# Altium PCB ch340-usb-serial_V1.1.PcbDoc
Units mil, origin at the board's own origin, x right, y up, seen from the top; angles counter-clockwise.
Board outline 2272.83 x 925 mil, 2 copper layers (Top Layer, Bottom Layer); 23 components, 23 nets, 102 pads, 27 vias.
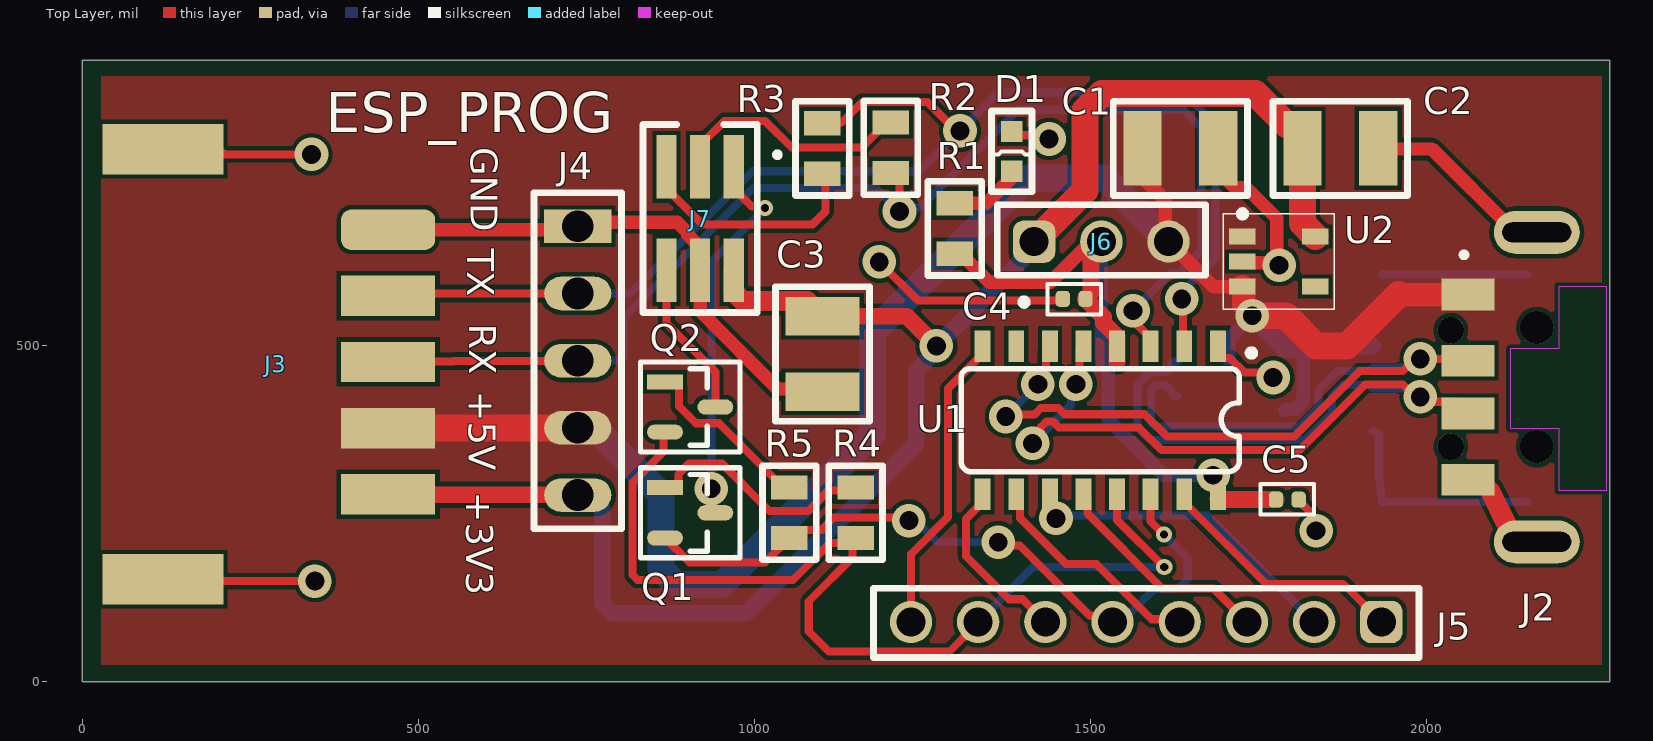
[diagram p0: Top Layer view]
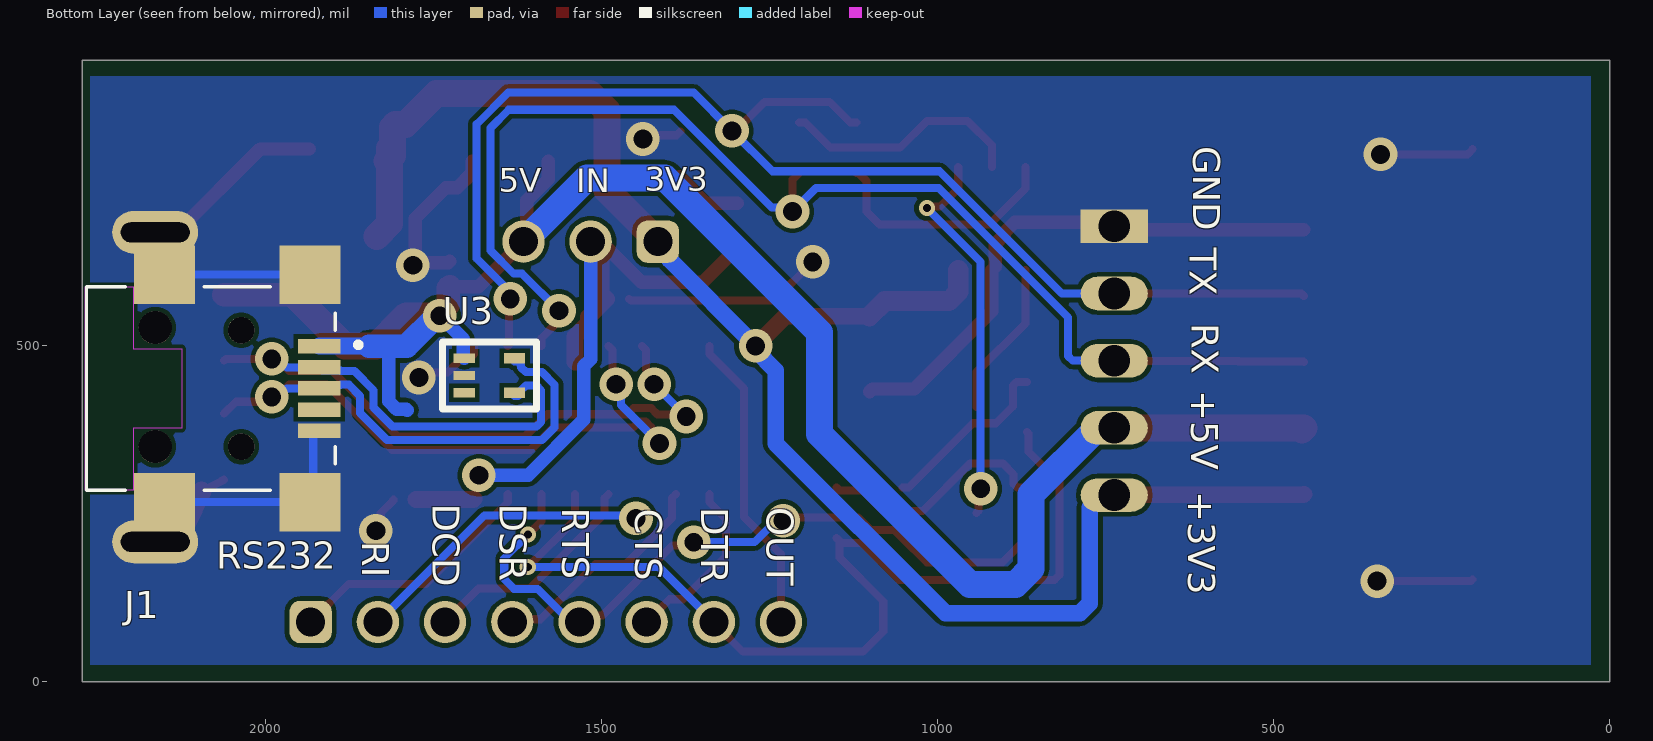
[diagram p1: Bottom Layer view, seen from below]
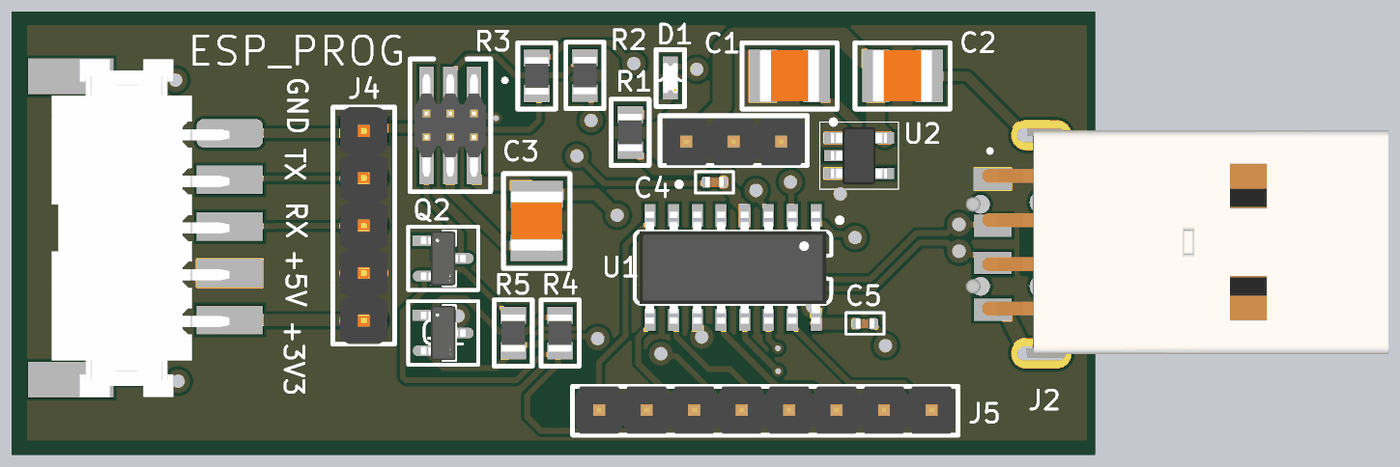
[diagram p2: 3D render of the assembled board from above, using the file's embedded part models]

## Layer stack, top to bottom
Top Solder: solder mask 0.4, Solder Resist, Dk 3.5
Top Layer: signal copper 1.4
Dielectric 1: dielectric 12.6, FR-4, Dk 4.8
Bottom Layer: signal copper 1.4
Bottom Solder: solder mask 0.4, Solder Resist, Dk 3.5

## Board outline
2272.83,925 2272.65,901 2272.65,0 0,0 0,925

## Design rules (kind name [scope] priority, off if disabled: settings)
Clearance "USB_holes and pins" [WithinRoom('PIN&HOLES') vs WithinRoom('PIN&HOLES')] p1: gap=0 ignorepadtopadclearanceinfootprint=TRUE
Clearance [All] p2: gap=6.5 ignorepadtopadclearanceinfootprint=TRUE
DiffPairsRouting [InDifferentialPairClass('DIFF90')] p1: maxlimit=10 minlimit=8 mostfreqgap=8 toplayer_minwidth=12 toplayer_maxwidth=12.5 toplayer_prefwidth=12 bottomlayer_minwidth=12 bottomlayer_maxwidth=12.5 bottomlayer_prefwidth=12 maxuncoupledlength=500
HoleSize [All] p1: absolutevalues=TRUE maxlimit=150 minlimit=1 maxpercent=80.000 minpercent=20.000
MinimumSolderMaskSliver [All] p1: minsoldermaskwidth=4.72
MinimumSolderMaskSliver usb_connector [WithinRoom('PIN&HOLES')] p2: minsoldermaskwidth=0
PolygonConnect [All] p1: connectstyle=Direct reliefconductorwidth=10 reliefentries=4 polygonreliefangle="90 Angle" airgapwidth=10
RoomDefinition PIN&HOLES [False] p1: confinementstyle=ConfineIn formatcopy=TRUE lockcomponents=FALSE outline 1888.8,632.57 2196.37,632.57 2196.37,240.37 1888.8,240.37
RoutingVias [All] p1: holewidth=28 width=50 viastyle="Through Hole" minholewidth=28 minwidth=50 maxholewidth=28 maxwidth=50
SilkToSilkClearance [All] p1: silktosilkclearance=4.5
SilkToSolderMaskClearance [IsPad] p1: minsilkscreentomaskgap=5.91 clearancetoexposedcopper=TRUE
SilkToSolderMaskClearance usb_pad [WithinRoom('PIN&HOLES')] p2: minsilkscreentomaskgap=0 clearancetoexposedcopper=TRUE
SolderMaskExpansion [All] p1: expansion=1.5 istentingtop=FALSE
SolderMaskExpansion usb_port [All] p2: expansion=1.5 istentingtop=FALSE
Width [All] p1: maxlimit=100 minlimit=6.5 preferedwidth=8 minimp=50.000000 maximp=50.000000 favimp=50.000000
25 further rules are at their usual default settings.

## Classes and differential pairs
differential pair class DIFF90: USB
differential pair USB: +USB_P -USB_N

## Components (designator, comment, footprint, x,y, rotation, side; value= is the part's Value field where it differs from the comment)
C1 "2.2uF, 1210" CAP_1210 1634,794 r0 top value=2.2uF
C2 "2.2uF, 1210" CAP_1210 1871.95,794 r0 top value=2.2uF
C3 "2.2uF, 1210" CAP_1210 1101.39,487.91 r270 top value=2.2uF
C4 "100nF, 0402" CAP_0402 1476,570 r0 top value=100nF
C5 "100nF, 0402" CAP_0402 1793.13,271.38 r180 top value=100nF
D1 "VLMW1300-GS08" LED_0603 1383.06,789.6 r90 top
J1 "USB MINI_F" USB_B_Female 2036.43,436.73 r270 bottom
J2 "USB A, MALE" USB_A_MALE 2164.39,438.7 r90 top
J3 "XH254wb-5P" 5PIN_HEADER_CONNECTOTOR 240,498 r270 top
J4 "2.54mm_5pin" 5X1P_MALE_2.54 737.22,678.07 r0 top locked
J5 "8x1, Male 2.54mm" 8x1P_Male_2.54 1583.09,89.21 r180 top
J6 "3P, Male 2.54mm" 3X1P_MALE_2.54 1516.35,655.24 r90 top locked
J7 "3x2_Male, SMD" 3x2P_Male_SMD_1.27 914.39,694.61 r270 top locked
Q1 "SS8050-G" FP-SS8050-G-IPC_B 904.54,251.69 r0 top
Q2 "SS8050-G" FP-SS8050-G-IPC_B 904.54,409.17 r0 top
R1 "2.2K, 0805" RES_0805 1298.24,674.92 r270 top value=2.2kR
R2 "0Ohm, 1206" RES_1206 1203,795 r90 top value=0R
R3 "0Ohm, 1206" RES_1206 1101.39,794 r270 top value=0R
R4 "10k, 0805" RES_0805 1150.61,251.69 r90 top value=10kR
R5 "10k, 0805" RES_0805 1052.18,251.69 r90 top value=10kR
U1 "USB-UART" SOP16 1514.78,389.49 r180 top locked
U2 "TLV74033PDBVR" SOT95P280X145-5N 1780.53,625.71 r0 top locked
U3 "TVSD, C4" SOT353 1667,451 r180 bottom

## Footprints (in the part's own frame and the unit in brackets; to place one, negate y for a bottom-side part, rotate by r counter-clockwise, add the part's x,y. Pads: shape width x height; smd on the part's side, far side on the other; paste and mask are expansions set on the pad)
3X1P_MALE_2.54 [mm] "Pin Header, pitch 2.54 mm, THT, Vertical, single row, 3p"
  rrect50% 1.6x1.6 hole 1.1: 1(0,2.54)
  round 1.6 hole 1.1: 2(0,0) 3(0,-2.54)
  silkscreen extent -2.41,-3.94 1.4,3.94, body extent -1.27,-3.81 1.27,3.81, height 8.57
3x2P_Male_SMD_1.27 [mm]
  rect 2.4x0.76 smd: 1(-1.823,1.397) 2(2.077,1.397) 3(-1.823,0.127) 4(2.077,0.127) 5(-1.823,-1.143) 6(2.077,-1.143)
  silkscreen extent -3.43,-2.03 3.68,3.15, body extent -2.62,-1.78 2.88,2.03, height 4.55
5PIN_HEADER_CONNECTOTOR [mil]
  rrect50% 60x140 smd: 1(-175,215)
  rect 60x140 smd: 2(-76.57,215) 3(21.85,215) 4(120.28,215) 5(218.7,215)
  rect 75.06x180 smd: S1(-295,-120)
  rect 75x180 smd: S2(345,-120)
  body extent -331,-160 381,214, height 197
5X1P_MALE_2.54 [mm]
  rect 2.54x1.27 hole 1.2: 1(0,0)
  oval 2.54x1.27 hole 1.2: 2(0,-2.54) 3(0,-5.08) 4(0,-7.62) 5(0,-10.16)
  silkscreen extent -1.65,-11.43 1.65,1.27, body extent -1.27,-11.43 1.27,1.27, height 8.55
8x1P_Male_2.54 [mm] "Pin Header, pitch 2.54 mm, THT, Vertical, single row, 8p"
  rrect50% 1.6x1.6 hole 1.1: 1(-8.89,0)
  round 1.6 hole 1.1: 2(-6.35,0) 3(-3.81,0) 4(-1.27,0) 5(1.27,0) 6(3.81,0) 7(6.35,0) 8(8.89,0)
  silkscreen extent -10.31,-1.27 10.31,1.35, body extent -10.16,-1.27 10.16,1.27, height 8.57
CAP_0402 [mm]
  rrect53% 0.54x0.6 smd: 1(-0.43,0) 2(0.43,0)
  silkscreen extent -1.02,-0.58 1.02,0.56, body extent -0.5,-0.28 0.5,0.27, height 0.5
CAP_1210 [mm]
  rect 1.45x2.81 smd: 1(-1.43,0) 2(1.43,0)
  silkscreen extent -2.54,-1.78 2.54,1.78, body extent -1.6,-1.4 1.6,1.4, height 2.49
FP-SS8050-G-IPC_B [mm]
  rect 1.357x0.572 smd paste+0 mask+0: 1(-0.951,0.95)
  rrect100% 1.357x0.572 smd paste+0 mask+0: 2(-0.951,-0.95) 3(0.951,0)
  silkscreen extent -1.88,-1.7 1.88,1.7, body extent -1.88,-1.7 1.88,1.7, height 0.25
LED_0603 [mm]
  rect 0.8x0.8 smd paste+0 mask+0: A+(-0.75,0) K-(0.75,0)
  silkscreen extent -1.52,-0.76 1.52,0.76, body extent -1.25,-0.6 1.25,0.6, height 0.25
RES_0805 [mm]
  rect 0.92x1.38 smd: 1(-0.955,0) 2(0.955,0)
  silkscreen extent -1.78,-1.02 1.78,1.02, body extent -1,-0.63 1,0.63, height 0.61
RES_1206 [mm]
  rect 0.92x1.38 smd: 1(-0.955,0) 2(0.955,0)
  silkscreen extent -1.78,-1.02 1.78,1.02, body extent -1,-0.63 1,0.63, height 0.6
SOP16 [mm]
  rect 0.6x1.2 smd: 1(-4.445,-2.8) 2(-3.175,-2.8) 3(-1.905,-2.8) 4(-0.635,-2.8) 5(0.635,-2.8) 6(1.905,-2.8) 7(3.175,-2.8) 8(4.445,-2.8) 9(4.445,2.8) 10(3.175,2.8) 11(1.905,2.8) 12(0.635,2.8) 13(-0.635,2.8) 14(-1.905,2.8) 15(-3.175,2.8) 16(-4.445,2.8)
  silkscreen extent -5.84,-2.67 5.26,1.95, body extent -5,-3 5,3, height 1.8
SOT95P280X145-5N [mm] "SOT23, 5-Leads, Body 2.90x2.80mm, Pitch 0.95mm, IPC Medium Density"
  rect 1x0.6 smd: 1(-1.375,0.95) 2(-1.375,0) 3(-1.375,-0.95) 4(1.375,-0.95) 5(1.375,0.95)
  silkscreen extent -2.1,-1.8 2.1,1.92, body extent -1.5,-1.53 1.5,1.53, height 1.45
SOT353 [mm] "SOTFL, 5-Leads, Body 2.01x2.11mm, Pitch 0.65mm, IPC Medium Density"
  rect 0.8x0.35 smd: 1(-0.95,0.777) 2(-0.95,0.127) 3(-0.95,-0.523)
  rect 0.8x0.4 smd: 4(0.95,-0.523) 5(0.95,0.777)
  silkscreen extent -1.78,-1.14 1.78,1.4, body extent -1.05,-0.88 1.05,1.13, height 0.91
USB_A_MALE [mm]
  rect 1.2x2 smd: 1(3.5,2.6) 2(1,2.6) 3(-1,2.6) 4(-3.5,2.6)
  oval 1.625x3.25 hole 0.75 slot 2.6 at 90 deg: S1(-5.85,0) S2(5.85,0)
  round 1.25 hole 1.25 unplated: ""(-2.25,0) ""(2.25,0)
  silkscreen extent 4.9,2.65 5.1,2.85, body extent -6.1,-18.56 6.33,3.32, height 4.5
USB_B_Female [mm]
  rect 0.55x1.6 smd: 1(-1.6,2.95) 2(-0.8,2.95) 3(0,2.95) 4(0.8,2.95) 5(1.6,2.95)
  rect 2.2x2.3 smd: S1(-4.3,-2.9) S2(4.3,-2.9) S3(-4.3,2.6) S4(4.3,2.6)
  round 1 hole 1 unplated: ""(-2.2,0) ""(2.2,0)
  Keep-Out Layer region: 1.5,-4.075 3.85,-4.075 3.85,-5.9 -3.85,-5.9 -3.85,-4.075 -1.5,-4.075 -1.5,-2.25 1.5,-2.25
  silkscreen extent -3.85,-5.85 3.85,4.52, body extent -4.96,-5.45 4.96,3.95, height 3.9

## Part data
C1 C2 C3: library part CL32B225KCJSNNE, "CAP CER 2.2UF 100V X7R 1210", Capacitor Type=Ceramic, Case/Package=1210, Manufacturer=Samsung, Max Operating Temperature=125°C, Min Operating Temperature=-55°C, Package Shape=Rectangular, Rated DC Voltage (URdc)=100V, Supplier Part Number=1276-3362-6-ND, Temperature Characteristics Code=X7R, Tolerance  (fill in as +-)=10%, Category="Ceramic Capacitors", ComponentLink1Description=https://datasheet.ciiva.com:443/pdfs/VipMasterIC/IC/SEMS/SEMS-S-A0008526420/SEMS-S-A0008525306-1.pdf?src-supplier=IHS+Markit, ComponentLink1URL=https://datasheet.ciiva.com:443/pdfs/VipMasterIC/IC/SEMS/SEMS-S-A0008526420/SEMS-S-A0008525306-1.pdf?src-supplier=IHS+Markit, ComponentLink2Description=https://datasheet.ciiva.com/25791/cl32b225kcjsnne-25791527.pdf?src-supplier=Digikey, ComponentLink2URL=https://datasheet.ciiva.com/25791/cl32b225kcjsnne-25791527.pdf?src-supplier=Digikey, ComponentLink3Description=https://datasheet.ciiva.com/26947/getdatasheetpartid-357497-26947037.pdf?src-supplier=Verical, ComponentLink3URL=https://datasheet.ciiva.com/26947/getdatasheetpartid-357497-26947037.pdf?src-supplier=Verical, ComponentLink4Description=https://datasheet.ciiva.com/16437/cl32b225kcjsnne-16437175.pdf?src-supplier=Future+Electronics, ComponentLink4URL=https://datasheet.ciiva.com/16437/cl32b225kcjsnne-16437175.pdf?src-supplier=Future+Electronics, Dielectric Material=Ceramic, JESD-609 Code=e3, Manufacturer Part Number=CL32B225KCJSNNE, Mounting Technology="Surface Mount", Multilayer=Yes, Packaging="Tape and Reel", Pins=2, Pricing="1=0.43, 10=0.286, 50=0.228, 100=0.1882, 500=0.14706 (USD)", Reach SVHC Compliant=Yes, RoHS=Yes, RoHS Compliant=Yes, Stock=239814, Supplier=Digikey, Terminal Finish=Nickel, Termination=Wraparound, Tolerance (fill in as +-)=10%
C4 C5: library part CL05B104KB54PNC, "0.1 µF ±10% 50V Ceramic Capacitor X7R 0402 (1005 Metric)", Case/Package=343Case, LCSC Part Number=C307331, Manufacturer=Samsung, Max Operating Temperature=125°C, Min Operating Temperature=-55°C, Tolerance=10%, Voltage Rating=50V, Category="Ceramic Capacitors", ComponentLink1Description=https://datasheet.octopart.com/CL05B104KB54PNC-Samsung-datasheet-8326407.pdf?src-supplier=TME, ComponentLink1URL=https://datasheet.octopart.com/CL05B104KB54PNC-Samsung-datasheet-8326407.pdf?src-supplier=TME, Height=550um, Manufacturer Part Number=CL05B104KB54PNC, Material=4241ConductorMaterial, Pricing="10000=0.0057 (USD)", RoHS=Yes, RoHS Compliant=Yes, Stock=2120000, Supplier="Arrow Electronics", Supplier Part Number=CL05B104KB54PNC
D1: "LED COOL WHITE 0603 SMD", Color=White, Forward Current=20mA, Forward Voltage=3.15V, Manufacturer="Vishay Semiconductors", Max Operating Temperature=80°C, Min Operating Temperature=-20°C, Supplier Part Number=VLMW1300-GS08CT-ND, Additional Feature="HIGH RELIABILITY", Category=LEDs, Channels=1, Color@wavelength=White, ComponentLink1Description=https://datasheet.ciiva.com:443/pdfs/VipMasterIC/IC/VISH/VISH-S-A0001807432/VISH-S-A0001807432-1.pdf?src-supplier=IHS+Markit, ComponentLink1URL=https://datasheet.ciiva.com:443/pdfs/VipMasterIC/IC/VISH/VISH-S-A0001807432/VISH-S-A0001807432-1.pdf?src-supplier=IHS+Markit, ComponentLink2Description=https://datasheet.ciiva.com/6858/vlmw1300-6858354.pdf?src-supplier=Newark, ComponentLink2URL=https://datasheet.ciiva.com/6858/vlmw1300-6858354.pdf?src-supplier=Newark, ComponentLink3Description=https://datasheet.ciiva.com/4688/vlmw1300-98499-4688159.pdf?src-supplier=Mouser, ComponentLink3URL=https://datasheet.ciiva.com/4688/vlmw1300-98499-4688159.pdf?src-supplier=Mouser, ComponentLink4Description=https://datasheet.ciiva.com/14650/vlmw1300-14650411.pdf?src-supplier=Element14, ComponentLink4URL=https://datasheet.ciiva.com/14650/vlmw1300-14650411.pdf?src-supplier=Element14, ComponentLink5Description=https://datasheet.ciiva.com/14650/vlmw1300-14650412.pdf?src-supplier=Element14, ComponentLink5URL=https://datasheet.ciiva.com/14650/vlmw1300-14650412.pdf?src-supplier=Element14, ComponentLink6Description=https://datasheet.ciiva.com/16388/vlmw1300-16388055.pdf?src-supplier=Future+Electronics, ComponentLink6URL=https://datasheet.ciiva.com/16388/vlmw1300-16388055.pdf?src-supplier=Future+Electronics, Luminous Intensity-Nom=112.5mcd, Manufacturer Part Number=VLMW1300-GS08, Mounting Technology="Surface Mount", Optoelectronic Device Type="SINGLE COLOR LED", Overall Height=0.55mm, Packaging="Tape and Reel", Pins=2, Pricing="1=0.46, 10=0.266, 100=0.1687, 500=0.13056, 1000=0.11887 (USD)", Reach SVHC Compliant=Yes, RoHS=Yes, RoHS Compliant=Yes, Shape=Rectangular, Size=1.1mm, Stock=7313, Supplier=Digikey, Terminal Pitch=1.5mm, Viewing Angle=130°
J1: library part GMSB0532112YEU, "MINI USB B TYPE RECEPTACLE 5POS", Manufacturer=Amphenol, Supplier Part Number=664-GMSB0532112YEUDKR-ND, Category=Connectors, Manufacturer Part Number=GMSB0532112YEU, Pricing="1=0.55, 10=0.476, 25=0.4352, 50=0.4094, 100=0.3924, 250=0.35824, 500=0.34118 (USD)", RoHS=No, Stock=5615, Supplier=Digikey
J2: library part 0480372200, "CONN PLUG USB2.0 TYPEA 4P SMD RA", Manufacturer=Molex, Supplier Part Number=WM3983CT-ND, Body/Shell Style=PLUG, ComponentLink1Description=https://datasheet.ciiva.com:443/pdfs/VipMasterIC/IC/MOLE/MOLES33218/MOLES28897-1.pdf?src-supplier=IHS+Markit, ComponentLink1URL=https://datasheet.ciiva.com:443/pdfs/VipMasterIC/IC/MOLE/MOLES33218/MOLES28897-1.pdf?src-supplier=IHS+Markit, Connector Type=USB, Contact Finish - Mating="GOLD (30)", Contact Finish - Termination=TIN, Contact Gender=Male, DIN Conformance=No, Empty Shell=No, Filter Feature=No, IEC Conformance=No, JESD-609 Code=e3, Manufacturer Part Number=0480372200, Mating Information="MULTIPLE MATING PARTS AVAILABLE", MIL Conformance=No, Mixed Contacts=No, Mounting Style="RIGHT ANGLE", Mounting Technology=Panel,Board, Number of Contacts=4, Option="General Purpose", Pricing="1=1.45, 10=1.199, 100=0.9993 (USD)", Reach SVHC Compliant=Yes, RoHS=Yes, RoHS Compliant=Yes, Stock=18158, Supplier=Digikey, Termination=SMD/SMT
J3: "SMT SMD Horizontal Socket Male Header Connector"
J4: "CONN HEADER VERT 5POS 2.54MM"
J5: library part 61300811121, "CONN HEADER VERT 8POS 2.54MM", Contact Resistance=20mR, Dielectric Withstanding Voltage (AC)=500V, Insulation Color=Black, Insulation Resistance=1GR, Manufacturer="Wurth Electronics", Manufacturer Series=613, Max Operating Temperature=125°C, Min Operating Temperature=-40°C, Rated Current (Signal)=3A, Supplier Part Number=732-5321-ND, Body Breadth=0.1inch, Body Depth=0.1inch, Body Length=0.8inch, Body/Shell Style=PLUG, Category="Headers and Wire Housings", ComponentLink1Description=https://datasheet.ciiva.com:443/pdfs/VipMasterIC/IC/MIDC/MIDCS07676/MIDCS07676-1.pdf?src-supplier=IHS+Markit, ComponentLink1URL=https://datasheet.ciiva.com:443/pdfs/VipMasterIC/IC/MIDC/MIDCS07676/MIDCS07676-1.pdf?src-supplier=IHS+Markit, ComponentLink2Description=https://datasheet.octopart.com/61300811121-W%C3%BCrth-Elektronik-datasheet-21154836.pdf?src-supplier=Element14, ComponentLink2URL=https://datasheet.octopart.com/61300811121-W%C3%BCrth-Elektronik-datasheet-21154836.pdf?src-supplier=Element14, ComponentLink3Description=https://katalog.we-online.de/em/datasheet/6130xx11121.pdf?src-supplier=Digikey, ComponentLink3URL=https://katalog.we-online.de/em/datasheet/6130xx11121.pdf?src-supplier=Digikey, Connector Type="BOARD CONNECTOR", Contact Finish - Mating=AU, Contact Finish - Termination="Gold (Au) - with Nickel (Ni) barrier", Contact Gender=Male, Contact Material="Copper Alloy", Contact Pattern=RECTANGULAR, Contact Style="SQ PIN-SKT", Insulation Material=Polybutylene, JESD-609 Code=e4, Manufacturer Part Number=61300811121, Mating Contact Pitch=0.1inch, Mounting Option 1=LOCKING, Mounting Style=STRAIGHT, Mounting Technology=Board, Number Of Connectors=1, Number of Contacts=8, Number of Rows Loaded=1, PCB Contact Pattern=RECTANGULAR, Pricing="1=0.39, 10=0.336, 25=0.28, 50=0.234, 100=0.212, 1000=0.193 (USD)", Reach SVHC Compliant=Yes, Reference Standard=UL, Reliability=COMMERCIAL, RoHS=Yes, RoHS Compliant=Yes, Stock=8009, Supplier=Digikey, Terminal Length=0.118inch, Terminal Pitch=2.54mm, Termination=Solder
J6: library part 61300311121, "CONN HEADER VERT 3POS 2.54MM", Contact Resistance=20mR, Dielectric Withstanding Voltage (AC)=500V, Insulation Color=Black, Insulation Resistance=1GR, Manufacturer="Wurth Electronics", Max Operating Temperature=125°C, Min Operating Temperature=-40°C, Rated Current (Signal)=3A, Supplier Part Number=732-5316-ND, Body Breadth=0.1inch, Body Depth=0.1inch, Body Length=0.3inch, Body/Shell Style=PLUG, Category="Headers and Wire Housings", ComponentLink1Description=https://datasheet.ciiva.com:443/pdfs/VipMasterIC/IC/MIDC/MIDCS07676/MIDCS07676-1.pdf?src-supplier=IHS+Markit, ComponentLink1URL=https://datasheet.ciiva.com:443/pdfs/VipMasterIC/IC/MIDC/MIDCS07676/MIDCS07676-1.pdf?src-supplier=IHS+Markit, ComponentLink2Description=http://www.farnell.com/cad/1737268.pdf?src-supplier=Element14, ComponentLink2URL=http://www.farnell.com/cad/1737268.pdf?src-supplier=Element14, ComponentLink3Description=https://datasheet.octopart.com/61300311121-W%C3%BCrth-Elektronik-datasheet-21154836.pdf?src-supplier=Element14, ComponentLink3URL=https://datasheet.octopart.com/61300311121-W%C3%BCrth-Elektronik-datasheet-21154836.pdf?src-supplier=Element14, ComponentLink4Description=https://katalog.we-online.de/em/datasheet/6130xx11121.pdf?src-supplier=Digikey, ComponentLink4URL=https://katalog.we-online.de/em/datasheet/6130xx11121.pdf?src-supplier=Digikey, Connector Type="BOARD CONNECTOR", Contact Finish - Mating=GOLD, Contact Finish - Termination="Gold (Au) - with Nickel (Ni) barrier", Contact Gender=Male, Contact Material="Copper Alloy", Contact Pattern=RECTANGULAR, Contact Style="SQ PIN-SKT", Insulation Material=Polybutylene, JESD-609 Code=e4, Manufacturer Part Number=61300311121, Mating Contact Pitch=0.1inch, Mounting Option 1=LOCKING, Mounting Style=STRAIGHT, Mounting Technology=Board, Number Of Connectors=1, Number of Contacts=3, Number of Rows Loaded=1, PCB Contact Pattern=RECTANGULAR, Pricing="1=0.13, 10=0.113, 25=0.094, 50=0.079, 100=0.071, 1000=0.066 (USD)", Reach SVHC Compliant=Yes, Reference Standard=UL, Reliability=COMMERCIAL, RoHS=Yes, RoHS Compliant=Yes, Stock=134142, Supplier=Digikey, Terminal Length=0.118inch, Terminal Pitch=2.54mm, Termination=Solder
J7: library part 20021121-00006C4LF, "CONN HEADER SMD 6POS 1.27MM", Manufacturer="Amphenol Communications Solutions", Supplier Part Number=609-3693-1-ND, Category="Headers and Wire Housings", Manufacturer Part Number=20021121-00006C4LF, Pricing="1=0.8, 10=0.612, 100=0.4694 (USD)", RoHS=No, Stock=7493, Supplier=Digikey
Q1 Q2: "TRANS NPN 25V 1.5A SOT23-3", LCSC Part Number=C164886, Manufacturer=Comchip, Supplier Part Number=641-1790-1-ND, Category=Transistors, ComponentLink1Description=https://datasheet.ciiva.com:443/pdfs/VipMasterIC/IC/COMC/COMC-S-A0004994192/COMC-S-A0004994192-1.pdf?src-supplier=IHS+Markit, ComponentLink1URL=https://datasheet.ciiva.com:443/pdfs/VipMasterIC/IC/COMC/COMC-S-A0004994192/COMC-S-A0004994192-1.pdf?src-supplier=IHS+Markit, ComponentLink2Description="http://www.comchiptech.com/admin/files/product/SS8050-G RevA181526.pdf?src-supplier=Digikey", ComponentLink2URL="http://www.comchiptech.com/admin/files/product/SS8050-G RevA181526.pdf?src-supplier=Digikey", Manufacturer Part Number=SS8050-G, Pricing="1=0.29, 10=0.2, 100=0.0978, 500=0.08154, 1000=0.05666 (USD)", Reach SVHC Compliant=Yes, RoHS=Yes, RoHS Compliant=Yes, Stock=90458, Supplier=Digikey
R1: library part CRCW08052K20FKEC, "RES SMD 2.2K OHM 1% 1/8W 0805", Case/Package=0805, Manufacturer="Vishay Dale", Max Operating Temperature=155°C, Min Operating Temperature=-55°C, Package Height=0.45mm, Package Length=2mm, Package Shape=Rectangular, Package Style=SMTMeter, Package Width=1.25mm, Power=125mW, Rated Temperature=70°C, Resistor Type="FIXED RESISTOR", Supplier Part Number=541-CRCW08052K20FKECCT-ND, Temperature Coefficient=100ppm/°C, Tolerance=1%, Working Voltage=150V, Category="Chip SMD Resistors", ComponentLink1Description=https://datasheet.ciiva.com:443/pdfs/VipMasterIC/IC/VISH/VISH-S-A0007266705/VISH-S-A0007266705-1.pdf?src-supplier=IHS+Markit, ComponentLink1URL=https://datasheet.ciiva.com:443/pdfs/VipMasterIC/IC/VISH/VISH-S-A0007266705/VISH-S-A0007266705-1.pdf?src-supplier=IHS+Markit, ComponentLink2Description=http://www.vishay.com/docs/20035/dcrcwe3.pdf?src-supplier=Digikey, ComponentLink2URL=http://www.vishay.com/docs/20035/dcrcwe3.pdf?src-supplier=Digikey, Construction=Chip, JESD-609 Code=e3, Manufacturer Part Number=CRCW08052K20FKEC, Mounting Technology="Surface Mount", Packaging="Tape and Reel", Pins=2, Pricing="1=0.1, 10=0.039, 50=0.025, 100=0.021, 500=0.01444, 1000=0.0125, 5000=0.00933, 10000=0.00838 (USD)", Reach SVHC Compliant=Yes, Reference Standard=AEC-Q200, RoHS=Yes, RoHS Compliant=Yes, Stock=19945, Supplier=Digikey, Technology="METAL GLAZE/THICK FILM", Terminal Finish=Nickel, Termination=Wraparound
R2 R3: library part RC1206JR-070RL, "RES 0 OHM JUMPER 1/4W 1206", Case/Package=1206, Manufacturer=Yageo, Max Operating Temperature=155°C, Min Operating Temperature=-55°C, Package Height=0.55mm, Package Length=3.1mm, Package Shape=Rectangular, Package Style=SMTMeter, Package Width=1.6mm, Power=250mW, Rated Temperature=70°C, Resistor Type="FIXED RESISTOR", Supplier Part Number=311-0.0ERCT-ND, Category="Chip SMD Resistors", ComponentLink1Description=https://datasheet.ciiva.com:443/pdfs/VipMasterIC/IC/YAGO/YAGO-S-A0008145938/YAGO-S-A0008145938-1.pdf?src-supplier=IHS+Markit, ComponentLink1URL=https://datasheet.ciiva.com:443/pdfs/VipMasterIC/IC/YAGO/YAGO-S-A0008145938/YAGO-S-A0008145938-1.pdf?src-supplier=IHS+Markit, ComponentLink2Description=https://datasheet.ciiva.com/11808/0900766b80c6630a-11808156.pdf?src-supplier=Rs, ComponentLink2URL=https://datasheet.ciiva.com/11808/0900766b80c6630a-11808156.pdf?src-supplier=Rs, ComponentLink3Description=https://datasheet.ciiva.com/29181/402222-da-01-en-smd-widerstand-0-ohm-1206-29181568.pdf?src-supplier=Conrad, ComponentLink3URL=https://datasheet.ciiva.com/29181/402222-da-01-en-smd-widerstand-0-ohm-1206-29181568.pdf?src-supplier=Conrad, ComponentLink4Description=https://datasheet.ciiva.com/22747/1692832-22747541.pdf?src-supplier=Element14, ComponentLink4URL=https://datasheet.ciiva.com/22747/1692832-22747541.pdf?src-supplier=Element14, ComponentLink5Description=https://datasheet.ciiva.com/46445/444357-46445719.pdf?src-supplier=Element14, ComponentLink5URL=https://datasheet.ciiva.com/46445/444357-46445719.pdf?src-supplier=Element14, ComponentLink6Description=https://datasheet.ciiva.com/17035/pyu-rc1206-51-rohs-l-4-17035512.pdf?src-supplier=Future+Electronics, ComponentLink6URL=https://datasheet.ciiva.com/17035/pyu-rc1206-51-rohs-l-4-17035512.pdf?src-supplier=Future+Electronics, Construction=Chip, JESD-609 Code=e3, Manufacturer Part Number=RC1206JR-070RL, Mounting Technology="Surface Mount", Packaging="Tape and Reel", Pins=2, Pricing="1=0.1, 10=0.048, 25=0.0364, 50=0.0276, 100=0.0193, 250=0.01556, 500=0.01244, 1000=0.00915 (USD)", Reach SVHC Compliant=Yes, RoHS=Yes, RoHS Compliant=Yes, Stock=903635, Supplier=Digikey, Technology="METAL GLAZE/THICK FILM", Terminal Finish=Nickel, Termination=Wraparound
R4 R5: library part RC0805FR-0710KL, "RES 10K OHM 1% 1/8W 0805", Case/Package=0805, Manufacturer=Yageo, Max Operating Temperature=155°C, Min Operating Temperature=-55°C, Package Height=0.5mm, Package Length=2mm, Package Shape=Rectangular, Package Style=SMTMeter, Package Width=1.25mm, Power=125mW, Rated Temperature=70°C, Resistor Type="FIXED RESISTOR", Supplier Part Number=311-10.0KCRCT-ND, Temperature Coefficient=100ppm/°C, Tolerance=1%, Working Voltage=150V, Additional Feature="LASER TRIMMABLE", Category="Chip SMD Resistors", ComponentLink1Description=https://datasheet.ciiva.com:443/pdfs/VipMasterIC/IC/YAGO/YAGO-S-A0008145938/YAGO-S-A0008145938-1.pdf?src-supplier=IHS+Markit, ComponentLink1URL=https://datasheet.ciiva.com:443/pdfs/VipMasterIC/IC/YAGO/YAGO-S-A0008145938/YAGO-S-A0008145938-1.pdf?src-supplier=IHS+Markit, Construction=Chip, JESD-609 Code=e3, Manufacturer Part Number=RC0805FR-0710KL, Mounting Technology="Surface Mount", Packaging="Tape and Reel", Pins=2, Pricing="1=0.1, 10=0.027, 50=0.017, 100=0.0142, 500=0.00976, 1000=0.00844 (USD)", Reach SVHC Compliant=Yes, RoHS=Yes, RoHS Compliant=Yes, Stock=1781403, Supplier=Digikey, Technology="METAL GLAZE/THICK FILM", Terminal Finish=Nickel, Termination=Wraparound
U1: library part CH340C, "SOP-16 USB to UART Converters"
U2: "IC REG LINEAR 3.3V 300MA SOT23-5"
U3: library part DF5A5.6FUTE85LF, "TVS Quad Common Anode 5.6V 200mW 5-Pin SOT-353 Embossed T/R", Manufacturer=Toshiba, Supplier Part Number=DF5A5.6FUTE85LFCT-ND, Category="TVS Diodes", ComponentLink1Description=https://datasheet.ciiva.com/29853/dst-df5a5-6fu-tde-en-9420-29853417.pdf?src-supplier=Digikey, ComponentLink1URL=https://datasheet.ciiva.com/29853/dst-df5a5-6fu-tde-en-9420-29853417.pdf?src-supplier=Digikey, ComponentLink2Description=https://datasheet.ciiva.com/29853/dst-df5a5-6fu-tde-en-9420-29853419.pdf?src-supplier=Digikey, ComponentLink2URL=https://datasheet.ciiva.com/29853/dst-df5a5-6fu-tde-en-9420-29853419.pdf?src-supplier=Digikey, ComponentLink3Description=https://datasheet.ciiva.com/29853/dst-df5a5-6fu-tde-en-9420-29853418.pdf?src-supplier=Digikey, ComponentLink3URL=https://datasheet.ciiva.com/29853/dst-df5a5-6fu-tde-en-9420-29853418.pdf?src-supplier=Digikey, Manufacturer Part Number=DF5A5.6FUTE85LF, Pricing="1=0.34, 10=0.21, 100=0.1318, 500=0.09776, 1000=0.08675 (USD)", RoHS=Yes, Stock=11607, Supplier=Digikey

## Via types
v1: diameter 50, hole 28, Top Layer to Bottom Layer, tented both sides, 24 vias
v2: diameter 24, hole 12, Top Layer to Bottom Layer, tented both sides, 3 vias

## Nets (pads, with @x,y where several pads share a name; then routed paths per layer and width w, separated by ;. In a path a pad name is that pad's centre, name@x,y a point inside that pad or via, vN(x,y) a via of type N, cw(c..) or ccw(c..) an arc to the next point about the centre after c; other vN are vias at no path point)
+3V3: C2.1 C3.1 J3.5 J4.5 J6.1 J7.2 U2.5 | length 2557.6
  Top Layer w25: J3.5 455.61,278.68 736.61,278.68 J4.5 ; C3.1 1226.79,544.21 v1(1271,500)
  Top Layer w30: J7.2 969.39,580.55 983.18,566.76 1078.85,566.76 C3.1
  Top Layer w40: J6.1 1492.23,731.11 1492.23,850.57 1517.47,875.82 1745.66,875.82 1792.16,829.32 1807.11,829.32 1811.16,825.27 1811.16,783.54 C2.1@1819.7,775 ; C2.1 1815.65,682.12 U2.5
  Bottom Layer w25: J4.5@737.19,278.04 J4.5 755.46,278.07 773.77,259.76 773.77,116.88 788.41,102.23 988.23,102.23 1241,355 1241,463.61 1271,493.61 v1(1271,500) 1399.36,628.36 1399.36,638.25 J6.1
+5V: C1.1 J1.1 J2.1 J3.4 J4.4 J6.3 U2.1 U2.3 U3.1 | length 2769.4
  Top Layer w20: C1.1@1579.7,775 1579.7,748.23 1611.2,716.73 1611.2,660.39 J6.3 1683.28,588.31 U2.3
  Top Layer w35: U2.3 1728.58,586.12 v1@1728.58,561.48 ; 1958.44,576.5 J2.1
  Top Layer w40: J3.4@457.81,374.91 J3.4 455.17,377.9 737.05,377.9 J4.4 ; v1(1741,545) 1791,545 1836,500 1881.94,500 1958.44,576.5
  Bottom Layer w20: U3.1 1705.73,482.92 1705.73,509.73 v1(1741,545) ; 1789.19,404.5 1790.69,406 1805.28,406 1817,417.72 1817,499.72
  Bottom Layer w25: 1846,499.72 J1.1
  Bottom Layer w35: v1(1741,545) 1745.06,545 1790.33,499.72 1817,499.72 1846,499.72
  Bottom Layer w40: J4.4@736.93,377.78 J4.4 762.22,378.07 861,279.29 861,168.43 884.43,145 952,145 1176,369 1176,520 1406,750 1521.59,750 J6.3
CTS#: J5.6 U1.9 | length 261.1
  Top Layer w12: U1.9 1339.78,267.44 1315,242.66 1315,187 1379,123 1399.3,123 J5.6
DCD#: J5.3 U1.12 | length 335.3
  Top Layer w12: U1.12 1495.59,273.44 1495.59,250.76 1607.14,139.21 1683.09,139.21 J5.3
DSR#: J5.4 U1.10 | length 339.4
  Top Layer w12: U1.10 1395.56,273.47 1395.56,243.75 1463.72,175.59 1508.93,175.59 1591.2,93.32 1628.98,93.32 J5.4
DTR_CH: J5.7 Q2.2 R4.1 U1.13 | length 1479.2
  Top Layer w12: Q2.2 864.88,369.53 864.88,342.51 819,296.63 819,159.03 826.03,152 1057.85,152 1112.47,206.62 1143.14,206.62 R4.1@1146.01,209.5 ; R4.1 R4.1@1146.01,209.5 ; J5.7@1329.07,84.07 1290,45 1111,45 1081,75 1081,120 1146.01,185.01 R4.1@1146.01,209.5 ; U1.13 1539.78,241.22 v2(1610,171)
  Bottom Layer w12: J5.7 1414.88,171 v2(1610,171)
ESP_EN: J7.1 Q1.3 | length 579.9
  Top Layer w12: v1(936,287.5) 938.98,284.52 938.98,254.68 Q1.3 ; J7.1 969.39,734.09 996.18,707.3 1013.7,707.3 v2(1016,705)
  Bottom Layer w12: v1(936,287.5) 936,625 v2(1016,705)
ESP_IO0: J7.6 Q2.3 | length 233.7
  Top Layer w12: J7.6 869.39,533.58 941.97,461 Q2.3
ESP_RXD: J7.5 R3.2 | length 364.5
  Top Layer w12: J7.5 869.39,734.09 922.98,680.5 1086.5,680.5 1106,700 1106,745.29 1118.11,757.4 R3.2@1121,757.4
ESP_TXD: J7.3 R2.2 | length 366.1
  Top Layer w12: J7.3 919.39,798.66 955.72,835 1016,835 1056,795 1159.35,795 1196.94,832.6 R2.2@1206,832.6
GND: C1.2 C2.2 C3.2 C4.1 C5.1 D1.K- J1.5 J1.S1 J1.S2 J1.S3 J1.S4 J2.4 J2.S1 J2.S2 J3.1 J3.S1 J3.S2 J4.1 J7.4 U1.1 U2.2 U3.2 | length 2854.5
  Top Layer w12: J3.S2@203.83,152.76 206.59,150 v1(346,150) ; J3.S1@203.83,792.76 211.59,785 v1(341,785) ; v1(1186,625) 1243.51,567.49 1456.56,567.49 C4.1 ; D1.K- 1388.67,813.51 1432.97,813.51 v1(1438.58,807.9) ; U1.1 1689.78,487.91 1695.59,482.1 1707.4,482.1 1729.23,460.27 1764.73,460.27 v1(1772,453) ; C5.1 1810.06,270.2 1828.73,251.52 1828.73,232.27 v1(1836,225) ; J2.4 J2.4@2095.39,283.28 ; J2.S1@2132.4,208.39 J2.S1
  Top Layer w20: J3.1 732.15,673 J4.1@734.69,675.54 ; J4.1@733.69,676.54 J4.1@734.69,675.54 ; C3.2 1097.12,435.89 1035.11,435.89 919.39,551.61 J7.4 914.43,617.8 914.43,651.71 900.85,665.29 900.85,668.54 885.39,684 743.15,684 J4.1 J4.1@734.69,675.54 ; C1.2@1692.3,775 1692.3,758.03 1714.84,735.49 1731.81,735.49 1777.53,689.77 v1@1777.53,623.47 ; U2.2 1728.2,623.9 1777.1,623.9 v1@1777.53,623.47 ; v1(1781,620) v1@1777.53,623.47 ; C2.2@1935.25,793.03 2008.38,793.03 2132.4,669.02 J2.S2
  Top Layer w30: J2.4@2095.39,283.28 J2.S1@2132.4,208.39
  Bottom Layer w12: J1.5 1929.23,368.91 1929.23,304.75 J1.S4 J1.S2 ; J1.S3 J1.S1
NetD1_A+: D1.A+ R1.1 | length 101.9
  Top Layer w20: R1.1 1345.05,712.52 D1.A+@1384,751.47
NetQ1_1: Q1.1 R4.2 | length 350.8
  Top Layer w12: Q1.1 881.57,289.09 886.84,294.36 886.84,308.81 903.03,325 951.78,325 1022.71,254.07 1079.91,254.07 1110.52,284.68 1146,284.68 R4.2
NetQ2_1: Q2.1 R5.2 | length 268.5
  Top Layer w12: Q2.1 882.57,446.57 887.84,441.31 887.84,410.16 913,385 947.42,385 1043.13,289.29 R5.2
OUT#: J5.8 U1.8 | length 454.7
  Top Layer w12: J5.8 1233.09,190.06 1288.41,245.38 1288.41,436.54 1339.78,487.91 U1.8
RI#: J5.2 U1.11 | length 451.5
  Bottom Layer w12: v1(1448.94,243.4) 1453.18,247.64 1674.66,247.64 J5.2
RS232: J5.1 U1.15 | length 378.9
  Top Layer w12: U1.15 1639.78,267.44 1761.22,146 1876.3,146 J5.1
RTS_CH: J5.5 Q1.2 R5.1 U1.14 | length 1077.3
  Top Layer w12: Q1.2 903.41,178 1016.09,178 R5.1 1064.29,226.2 1099.76,226.2 1118.26,244.7 1225.3,244.7 v1(1230,240) ; v1(1363,208) 1367.91,203.09 1394.91,203.09 1499.03,98.97 1523.33,98.97 J5.5 ; U1.14 1589.78,239.22 v2(1609.5,219.5)
  Bottom Layer w12: v1(1230,240) 1240.28,240 1272.28,208 v1(1363,208) ; J5.5@1525.01,68.01 1595.21,138.21 1630.18,138.21 1645,153.03 1645,184 v2(1609.5,219.5)
RXD_CH: J3.3 J4.3 R2.1 U1.3 | length 1916.1
  Top Layer w12: J3.3 455.85,477 552,477 552.54,477.54 736.69,477.54 J4.3 ; R2.1@1206,757.4 1216,747.4 v1(1216,700) 1213.68,693.03 v1@1210.3,689.65 ; v1(1563.52,552.5) 1570.79,545.23 1570.79,530.52 1589.78,511.54 U1.3
  Bottom Layer w12: J4.3 798.97,478.07 806,485.1 806,542.64 998.36,735 1181,735 v1(1216,700) 1221.91,705.91 1246.91,705.91 1392.5,851.5 1638.34,851.5 1665.42,824.42 1665.42,642.08 1630.84,607.5 1618.52,607.5 v1(1563.52,552.5) 1561.97,550.95 v1@1546.55,550.95
TXD_CH: J3.2 J4.2 R3.1 U1.2 | length 1947.6
  Top Layer w12: J3.2@455.57,574 J3.2 458.5,578.07 J4.2 ; R3.1@1121,832.6 1130.06,832.6 1160.67,863.21 1257.79,863.21 1301,820 v1(1306,820) ; v1(1636,570) 1637.89,568.11 1637.89,501.61 U1.2
  Bottom Layer w12: J4.2@735.19,576.04 J4.2 815.27,578.07 997.2,760 1246,760 v1(1306,820) 1363,877 1639,877 1686,830 1686,630.28 1636,580.28 v1(1636,570)
USB_N: J1.2 J2.2 U1.6 U3.4 | length 1450.4
  Top Layer w12: v1(1374.05,394.95) 1377.21,398.11 1417.05,398.11 1426.26,407.33 1452.77,407.33 1461.76,398.34 1580.88,398.34 1614.22,365 1803.48,365 1900.96,462.48 1964.97,462.48 1983.22,480.73 v1(1991,480.73) 2059.36,480.73 J2.2 ; v1(1422,443) 1422,453.28 1433.97,465.25 1433.97,493.91 U1.6
  Bottom Layer w12: v1@1374.05,395 v1@1422,442.95 ; U3.4@1629.6,425.41 1624.68,425.41 1619.85,430.24 1619.85,433.97 1612.82,441 1597.03,441 1590,433.97 1590,387.03 1597.03,380 1811.1,380 1839.5,408.4 1839.5,433.97 1868.01,462.48 1887.77,462.48 1888.69,463.4 1915.46,463.4 J1.2 1968.22,468.23 1980.72,480.73 v1(1991,480.73)
USB_P: J1.3 J2.3 U1.5 U3.5 | length 1524.6
  Top Layer w12: v1(1414,355) 1414,365.28 1426.22,377.51 1426.22,379 1434.54,387.33 1444.49,387.33 1453.47,378.34 1572.6,378.34 1605.94,345 1811.76,345 1909.24,442.48 1964.97,442.48 1983.22,424.23 v1(1991,424.23) ; v1(1478.5,443) 1484.14,448.64 1484.14,494.08 U1.5 ; v1@2008.56,416.95 2044.4,416.95 J2.3
  Bottom Layer w12: v1(1414,355) 1471.23,412.23 1471.23,435.73 v1(1478.5,443) ; U3.5@1629.6,476.59 1624.68,476.59 1619.85,471.76 1619.85,468.03 1612.82,461 1588.75,461 1570,442.25 1570,378.75 1588.75,360 1819.39,360 1859.5,400.11 1859.5,425.69 1876.3,442.48 1887.77,442.48 1888.69,441.56 1915.46,441.56 J1.3 1968.22,436.73 1980.72,424.23 v1(1991,424.23)
V_CHIP: C4.2 C5.2 J6.2 R1.2 U1.4 U1.16 | length 990.4
  Top Layer w20: R1.2 1307.3,637.32 1349.62,595 1440.75,595 1490.57,644.82 J6.2@1496.06,644.82 ; C4.2 1492.93,571.18 C4.2@1501,579.25 ; J6.2@1501,639.88 J6.2
  Top Layer w25: C4.2 1519.52,543.41 1519.52,534.27 1539.78,514.02 U1.4 U1.4@1539.78,476.22 ; C4.2@1501,579.25 J6.2@1501,639.88 ; U1.16@1689.78,272.07 1690.47,271.38 C5.2
  Bottom Layer w20: J6.2 1516.35,480.19 1527,469.54 1527,389.93 1609.43,307.5 v1(1682.75,307.5)
pads on no net: J1. J1.4 J2. U1.7 U2.4 U3.3

## Polygon pours and split planes (outlines as drawn)
GND on Bottom Layer "GND" (solid, remove dead copper, pour order 0): 28,901 28,25.32 2261,25.32 2261,901
+5V on Top Layer "GND" (solid, remove dead copper, pour order 6): 28,901 2261,901 2261,25.32 28,25.32

## Silkscreen, mask and mechanical layers (free items; w line width, h text height)
Top Overlay:
  text "ESP_PROG" at 362,818 h60
  text "GND" at 578,796 h40 r270
  text "TX" at 573,645 h40 r270
  text "RX" at 576,533 h40 r270
  text "+5V" at 575,433 h40 r270
  text "+3V3" at 571,283 h40 r270
Bottom Overlay:
  text "GND" at 620,797 h40 r90
  text "3V3" at 1436.04,718.84 h60
  text "5V" at 1653.02,717.35 h60
  text "IN" at 1537.81,716.51 h60
  text "TX" at 625,646 h40 r90
  text "RX" at 622,534 h40 r90
  text "+5V" at 623,434 h40 r90
  text "+3V3" at 627,284 h40 r90
  text "DSR" at 1652,265 h40 r90
  text "DCD" at 1751.13,265.38 h40 r90
  text "OUT" at 1254,260 h40 r90
  text "DTR" at 1352,260 h40 r90
  text "RTS" at 1559,259 h40 r90
  text "CTS" at 1450,258 h40 r90
  text "RI" at 1856.54,209.42 h40 r90
  text "RS232" at 2073.45,168.66 h40
Board Shape:
  lines w10: 2272.65,0 0,0 0,925 2272.83,925 2272.65,924.82 2272.65,0 ; 2272.65,0 2272.65,0

## Text inside footprints (layer, text, board x,y; h text height)
J2: Mechanical 1 "PCB EDGE" at 2262.81,300.91 h40 r90